# EAGLE board Coprocessor_Board_Rev2 (EAGLE 8.5.2)
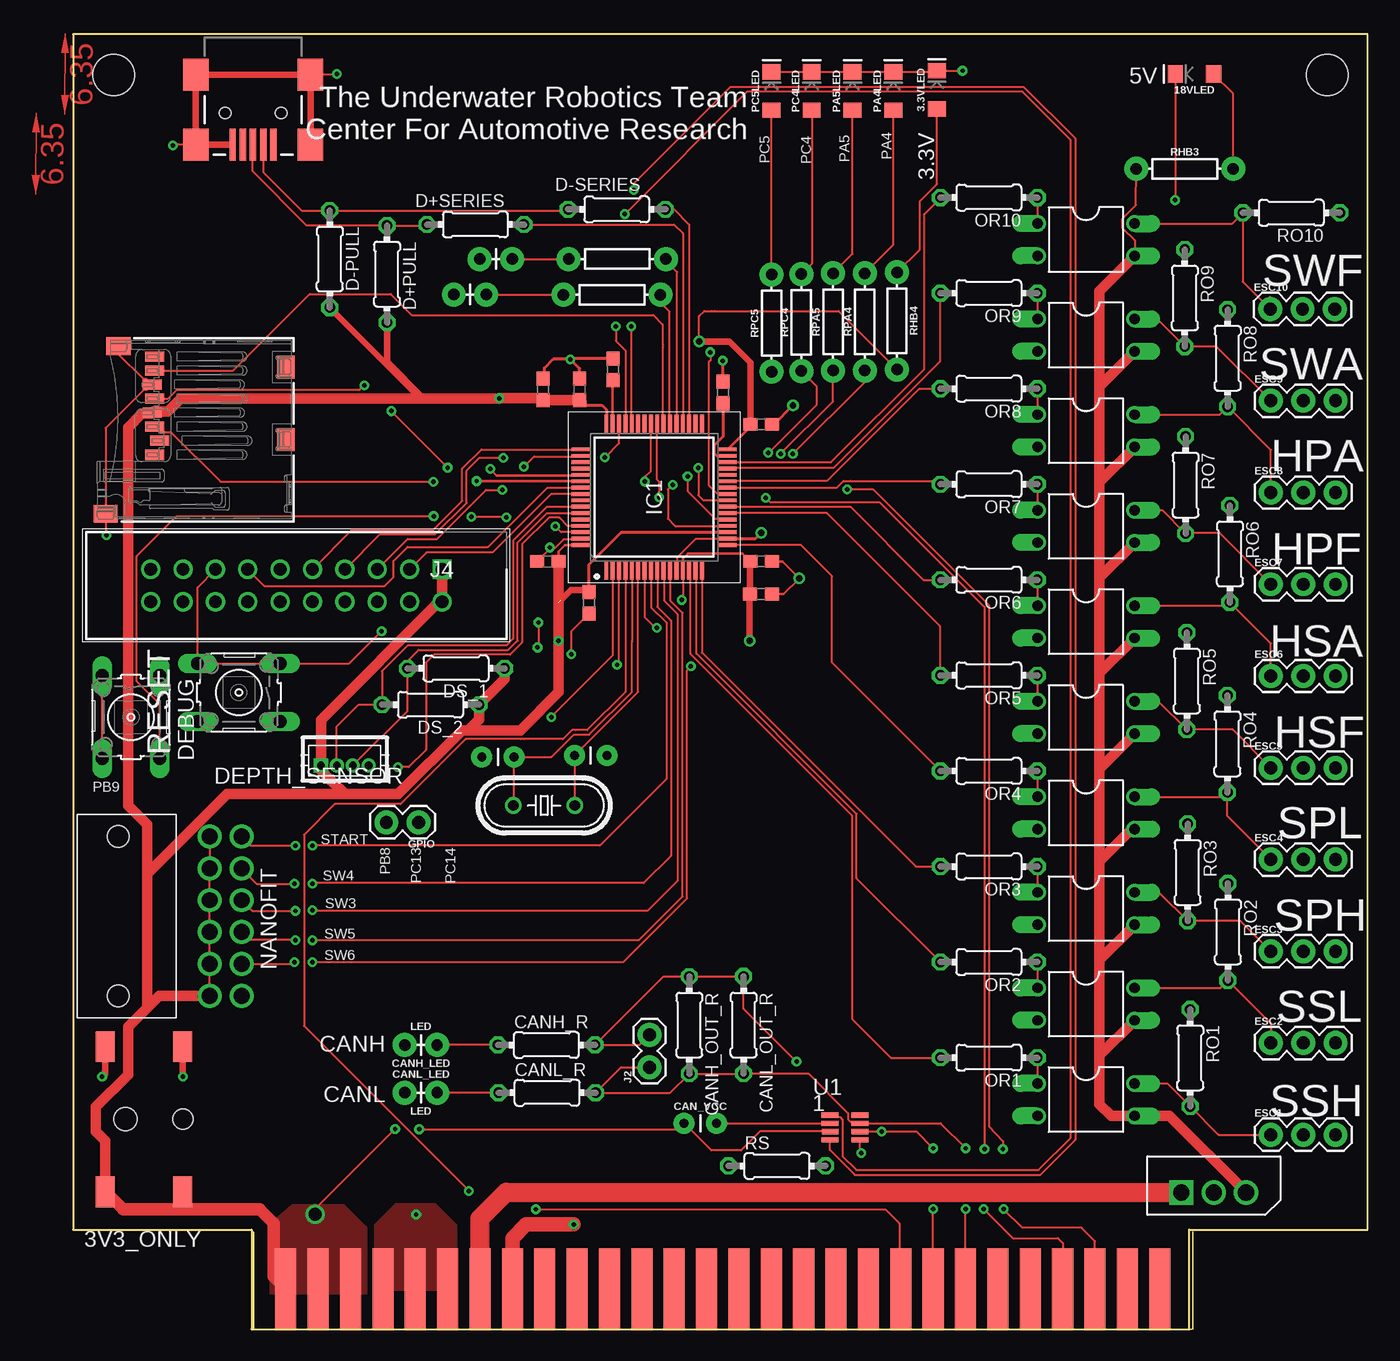
[diagram p0: board, top side]
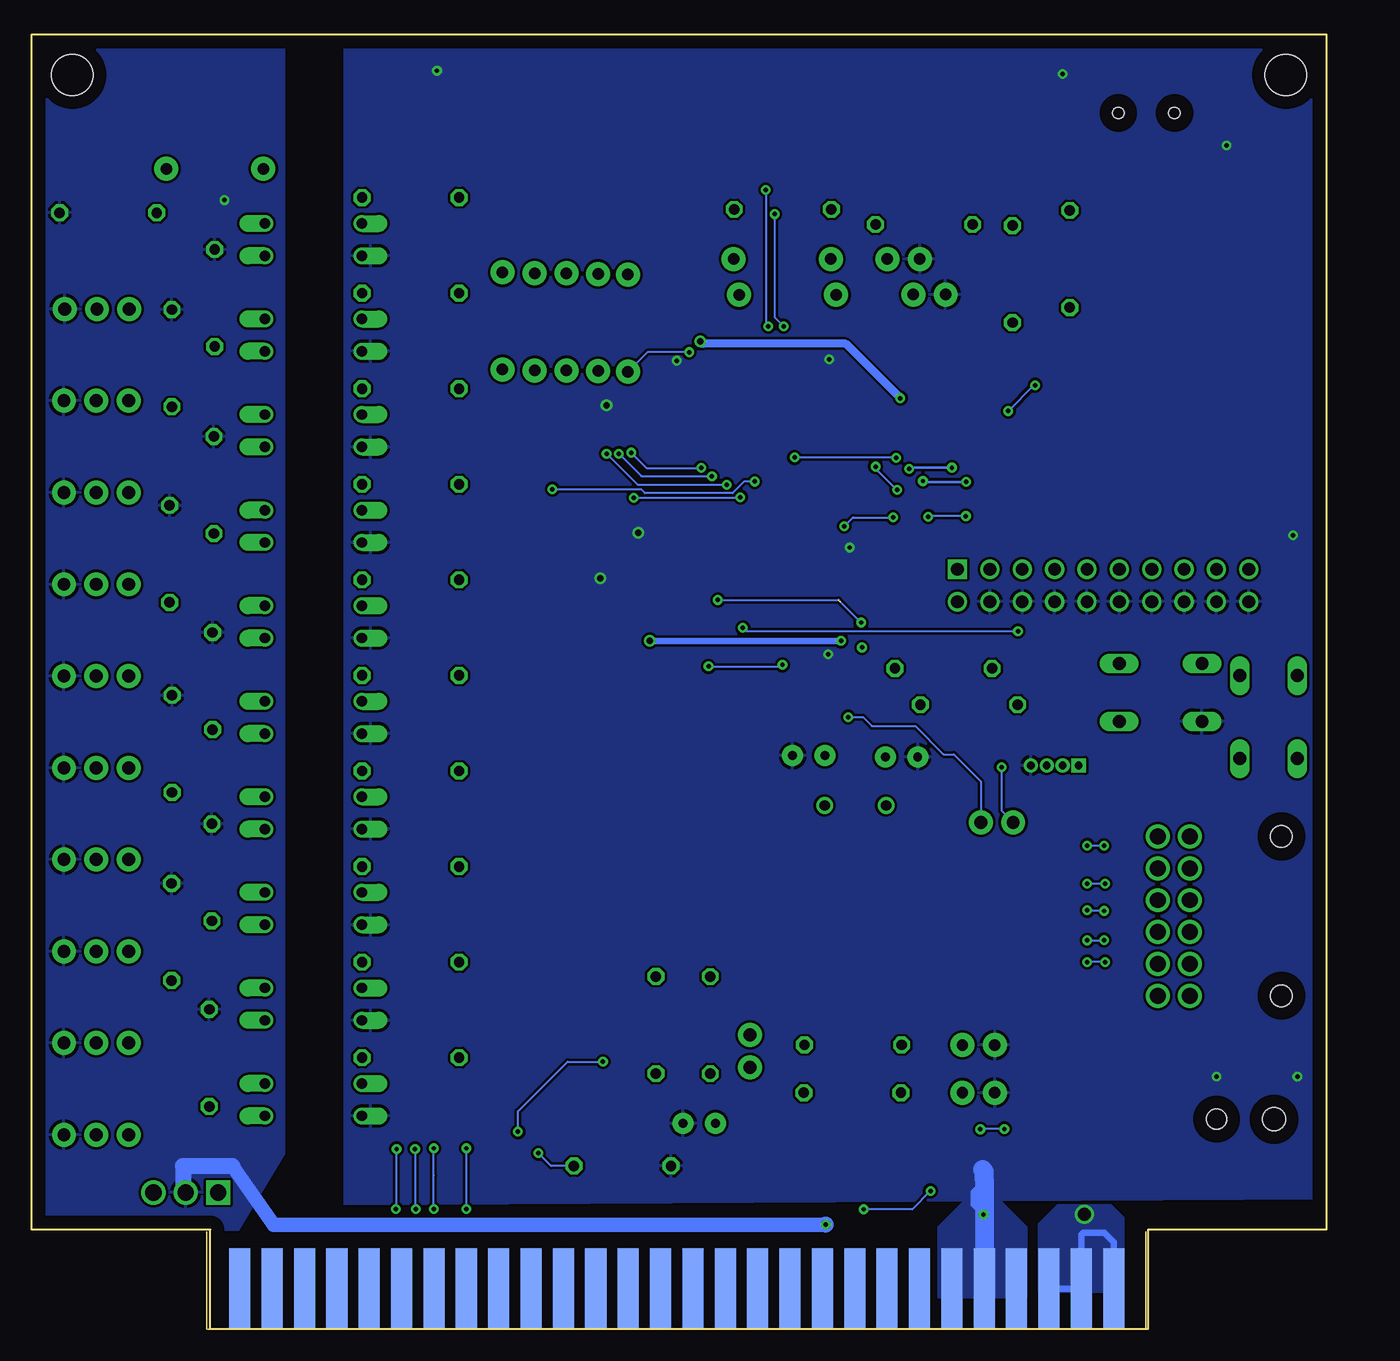
[diagram p1: board, bottom side, seen from below]

Size 101.6 x 101.6 mm. Coordinates in mm from the lower left corner, seen from the top.
Outline: 14,0 87.6,0 87.6,7.8 101.6,7.8 101.6,101.6 0,101.6 0,7.8 14,7.8 14,0
Copper layers (1*16): Top 0.035mm / dielectric 1.5mm / Bottom 0.035mm
Design rules "battery_balancer": minimum track width 6mil, minimum drill 0.35mm, track to track 0.205mm, track to pad 0.205mm, pad to pad 0.205mm, via to via 0.205mm, smd to smd 6mil, copper to edge 40mil, drill to drill 6mil, minimum pad ring 10mil, minimum via ring 8mil, stop-mask expansion 4mil, vias tented up to drill 0mil, thermal gap 10mil
Holes 3.26 mm at 3.17,98.42 98.42,98.42

## Footprints (pad centres in the part's own frame; a part is rotated, then mirrored left to right if it is on the bottom)
LED-1206 = smd 1.2 x 1.4: A -1.5,0; C 1.5,0
CUI_PJ-002AH-SMT-TR = smd 1.5 x 2.4: 1.1 -3.05,5.7; 1.2 3.05,5.7; 2 -3.05,-5.7; 3 3.05,-5.7 | hole 1.6: -3.05,0 | hole 1.8: 1.45,0
0603 = smd 1.1 x 1: 1 -0.85,0; 2 0.85,0
CAP-PTH-2.54 = drill 0.7 pad 1.651: 1 -1.27,0; 2 1.27,0
AXIAL-0.1 = drill 0.9 pad 1.88: P$1 -1.27,0; P$2 1.27,0
0204/7 = drill 0.813 octagon: 1 -3.81,0; 2 3.81,0
B3F-10XX = drill 1.016 long: 1 -3.251,2.261; 2 3.251,2.261; 3 -3.251,-2.261; 4 3.251,-2.261
DF13-4P-1.25DSA = drill 0.6 pad 1.016 square: P$1 1.875,0 | drill 0.6 pad 1.016: P$2 0.625,0; P$3 -0.625,0; P$4 -1.875,0
1X03 = drill 1.016 pad 1.88: 1 0,0; 2 2.54,0; 3 5.08,0
1X02 = drill 1.016 pad 1.88: 1 0,0; 2 2.54,0
QFP50P1200X1200X160-64N = smd 1.45 x 0.3: 1 -5.75,3.75; 2 -5.75,3.25; 3 -5.75,2.75; 4 -5.75,2.25; 5 -5.75,1.75; 6 -5.75,1.25; 7 -5.75,0.75; 8 -5.75,0.25; 9 -5.75,-0.25; 10 -5.75,-0.75; 11 -5.75,-1.25; 12 -5.75,-1.75; 13 -5.75,-2.25; 14 -5.75,-2.75; 15 -5.75,-3.25; 16 -5.75,-3.75; 33 5.75,-3.75; 34 5.75,-3.25; 35 5.75,-2.75; 36 5.75,-2.25; 37 5.75,-1.75; 38 5.75,-1.25; 39 5.75,-0.75; 40 5.75,-0.25; 41 5.75,0.25; 42 5.75,0.75; 43 5.75,1.25; 44 5.75,1.75; 45 5.75,2.25; 46 5.75,2.75; 47 5.75,3.25; 48 5.75,3.75 | smd 0.3 x 1.45: 17 -3.75,-5.75; 18 -3.25,-5.75; 19 -2.75,-5.75; 20 -2.25,-5.75; 21 -1.75,-5.75; 22 -1.25,-5.75; 23 -0.75,-5.75; 24 -0.25,-5.75; 25 0.25,-5.75; 26 0.75,-5.75; 27 1.25,-5.75; 28 1.75,-5.75; 29 2.25,-5.75; 30 2.75,-5.75; 31 3.25,-5.75; 32 3.75,-5.75; 49 3.75,5.75; 50 3.25,5.75; 51 2.75,5.75; 52 2.25,5.75; 53 1.75,5.75; 54 1.25,5.75; 55 0.75,5.75; 56 0.25,5.75; 57 -0.25,5.75; 58 -0.75,5.75; 59 -1.25,5.75; 60 -1.75,5.75; 61 -2.25,5.75; 62 -2.75,5.75; 63 -3.25,5.75; 64 -3.75,5.75
USB-MINIB = smd 2.5 x 0.5: D+ 2.5,0; D- 2.5,0.8; GND 2.5,-1.6; ID 2.5,-0.8; VBUS 2.5,1.6 | smd 2.5 x 2: S1 -3,4.5; S2 2.5,4.5; S3 -3,-4.5; S4 2.5,-4.5 | hole 0.9: 0,2.2; 0,-2.2
SHDR20W81P254_2X10_3300X840X93 = drill 1 pad 1.5 square: 1 0,0 | drill 1 pad 1.5: 2 0,2.54; 3 2.54,0; 4 2.54,2.54; 5 5.08,0; 6 5.08,2.54; 7 7.62,0; 8 7.62,2.54; 9 10.16,0; 10 10.16,2.54; 11 12.7,0; 12 12.7,2.54; 13 15.24,0; 14 15.24,2.54; 15 17.78,0; 16 17.78,2.54; 17 20.32,0; 18 20.32,2.54; 19 22.86,0; 20 22.86,2.54
5008730806 = smd 0.8 x 1.5: 1 -1.94,10.7; 2 -0.84,10.3; 3 0.26,10.7; 4 1.36,10.9; 5 2.46,10.7; 6 3.56,10.9; 7 4.66,10.7; 8 5.76,10.7 | smd 1.8 x 1.4: CD1 -0.75,0.4; CD2 4.95,0.4 | smd 1.4 x 1.9: S3 -6.575,14.55; S4 6.575,13.55
DIL04 = drill 0.813 offset: 1 -1.27,-3.81; 2 1.27,-3.81; 3 1.27,3.81; 4 -1.27,3.81
HC49/S = drill 0.813: 1 -2.413,0; 2 2.413,0
TO254P450X1020X1935-3P = drill 1.27 square: 1 -5.08,-1.092 | drill 1.27: 2 -2.54,-1.092; 3 0,-1.092
AXIAL-0.3 = drill 0.9 pad 1.88: P$1 -3.81,0; P$2 3.81,0
8-SOICN = smd 1.3 x 0.42: 1 -1.175,0.975; 2 -1.175,0.325; 3 -1.174,-0.325; 4 -1.175,-0.975; 5 1.175,0.975; 6 1.175,0.325; 7 1.174,-0.325; 8 1.175,-0.975
5530843-6-BOARDFINGERS = smd 1.651 x 6.35 bottom: 3.3V_4 0.826,3.175; 3.3V_5 3.365,3.175; 3.3V_6 5.905,3.175; EXTRA1 16.066,3.175; EXTRA2 18.605,3.175; EXTRA3 21.145,3.175; EXTRA4 23.686,3.175; EXTRA5 26.226,3.175; EXTRA6 28.765,3.175; EXTRA7 31.305,3.175; EXTRA8 33.846,3.175; EXTRA9 36.386,3.175; EXTRA10 38.925,3.175; EXTRA11 41.465,3.175; EXTRA12 44.005,3.175; EXTRA13 46.545,3.175; EXTRA14 49.086,3.175; EXTRA15 51.626,3.175; EXTRA16 54.166,3.175; EXTRA17 56.706,3.175; EXTRA18 59.245,3.175; EXTRA19 61.785,3.175; EXTRA20 64.326,3.175; EXTRA21 66.865,3.175; EXTRA22 69.406,3.175; GND_4 8.445,3.175; GND_5 10.986,3.175; GND_6 13.525,3.175 | smd 1.651 x 6.35: 3.3VP1 0.826,3.175; 3.3VP2 3.365,3.175; 3.3VP3 5.905,3.175; CAN_H 51.626,3.175; CAN_L 54.166,3.175; EXTRA23 16.066,3.175; EXTRA24 18.605,3.175; EXTRA25 21.145,3.175; EXTRA26 23.686,3.175; EXTRA27 26.226,3.175; EXTRA28 28.765,3.175; EXTRA29 31.305,3.175; EXTRA30 33.846,3.175; EXTRA31 36.386,3.175; EXTRA32 38.925,3.175; EXTRA33 41.465,3.175; EXTRA34 44.005,3.175; EXTRA35 46.545,3.175; GND1 8.445,3.175; GND2 10.986,3.175; GND3 13.525,3.175; KILL_SWITCH 49.086,3.175; SCL_DEPTH 59.245,3.175; SCL_ESC 69.406,3.175; SCL_SENSOR 64.326,3.175; SDA_DEPTH 56.706,3.175; SDA_ESC 66.865,3.175; SDA_SENSOR 61.785,3.175
105314-2112 = drill 1.25: CK1 12.5,2.5; CK2 10,2.5; CK3 7.5,2.5; CK4 5,2.5; CK5 2.5,2.5; CK6 0,2.5; CK7 12.5,0; CK8 10,0; CK9 7.5,0; CK10 5,0; CK11 2.5,0; CK12 0,0 | hole 1.7: 0,-7.18; 12.5,-7.18

## Placement (x,y rotation side)
3.3VLED  WHITE  [LED-1206]  67.8,97.25 90 top
3V3_ONLY  PJ-002AH-SMT-TR  [CUI_PJ-002AH-SMT-TR]  5.56,16.47 180 top
18VLED  WHITE  [LED-1206]  88,98.5 180 top
C1  4.7 uF  [0603]  36.88,73.74 90 top
C2  .1 uF  [0603]  39.75,73.75 90 top
C3  .1 uF  [0603]  37.25,60.25 180 top
C4  .1 uF  [0603]  40.5,57 270 top
C5  .1 uF  [0603]  54,71 0 top
C7  1 uF  [0603]  54,60.25 0 top
C8  1 nF  [CAP-PTH-2.54]  33.35,44.9 0 top
C9  1 nF  [CAP-PTH-2.54]  40.63,45.01 180 top
C10  .1 uF  [0603]  53.99,57.68 0 top
C11  2.2uF  [0603]  42.38,75.32 270 top
C12  2.2 uF  [0603]  51,73.5 90 top
CAN_VCC  .1 uF  [CAP-PTH-2.54]  49.23,16.15 0 top
CANH_LED  LED  [AXIAL-0.1]  27.3,22.3 180 top
CANH_OUT_R  120  [0204/7]  48.36,23.85 270 top
CANH_R  330  [0204/7]  37.15,22.3 0 top
CANL_LED  LED  [AXIAL-0.1]  27.3,18.55 0 top
CANL_OUT_R  120  [0204/7]  52.62,23.86 270 top
CANL_R  330  [0204/7]  37.2,18.55 0 top
D+PULL  1.5k  [0204/7]  24.64,82.8 270 top
D+SERIES  22Ω  [0204/7]  31.58,86.69 180 top
D-PULL  1.5k  [0204/7]  20.15,83.98 270 top
D-SERIES  22Ω  [0204/7]  42.67,87.88 180 top
DEBUG  [B3F-10XX]  4.54,48.02 270 top
DEPTH_SENSOR  DF13-4P-1.25DSA  [DF13-4P-1.25DSA]  21.32,44.23 180 top
DS_1  4.7k  [0204/7]  30.05,51.85 180 top
DS_2  4.7k  [0204/7]  28.05,49 180 top
ESC1  [1X03]  94,15.25 0 top
ESC2  [1X03]  94,22.45 0 top
ESC3  [1X03]  94,29.65 0 top
ESC4  [1X03]  94,36.85 0 top
ESC5  [1X03]  94,44.05 0 top
ESC6  [1X03]  94,51.25 0 top
ESC7  [1X03]  94,58.45 0 top
ESC8  [1X03]  94,65.65 0 top
ESC9  [1X03]  94,72.85 0 top
ESC10  [1X03]  93.95,80.05 0 top
GPIO  [1X02]  27.13,39.78 180 top
HBL1  LED  [AXIAL-0.1]  33.19,83.98 180 top
HBL2  LED  [AXIAL-0.1]  31.15,81.19 180 top
IC1  STM32F405RGT6  [QFP50P1200X1200X160-64N]  45.6,65.29 90 top
J1  USB_MINI-B_SMT  [USB-MINIB]  14.13,95.45 270 top
J2  [1X02]  45.24,20.55 90 top
J4  30320-6002HB  [SHDR20W81P254_2X10_3300X840X93]  28.95,59.62 180 top
J5  5008730806  [5008730806]  17.11,70.56 90 top
OI1  SFH610  [DIL04]  79.5,18 270 top
OI2  SFH610  [DIL04]  79.5,25.5 270 top
OI3  SFH610  [DIL04]  79.5,33 270 top
OI4  SFH610  [DIL04]  79.5,40.5 270 top
OI5  SFH610  [DIL04]  79.5,48 270 top
OI6  SFH610  [DIL04]  79.5,55.5 270 top
OI7  SFH610  [DIL04]  79.5,63 270 top
OI8  SFH610  [DIL04]  79.5,70.5 270 top
OI9  SFH610  [DIL04]  79.5,78 270 top
OI10  SFH610  [DIL04]  79.5,85.5 270 top
OR1  220  [0204/7]  71.88,21.3 180 top
OR2  220  [0204/7]  71.88,28.8 180 top
OR3  220  [0204/7]  71.88,36.3 180 top
OR4  220  [0204/7]  71.88,43.8 180 top
OR5  220  [0204/7]  71.88,51.3 180 top
OR6  220  [0204/7]  71.88,58.8 180 top
OR7  220  [0204/7]  71.88,66.3 180 top
OR8  220  [0204/7]  71.88,73.8 180 top
OR9  220  [0204/7]  71.88,81.3 180 top
OR10  220  [0204/7]  71.88,88.8 180 top
OSCILLATOR  [HC49/S]  36.97,41.09 180 top
PA4LED  WHITE  [LED-1206]  64.38,97.16 90 top
PA5LED  WHITE  [LED-1206]  61.18,97.16 90 top
PC4LED  WHITE  [LED-1206]  57.97,97.16 90 top
PC5LED  WHITE  [LED-1206]  54.82,97.16 90 top
Q1  L78M05CV  [TO254P450X1020X1935-3P]  92.06,11.8 0 top
RESET  [B3F-10XX]  13.01,49.96 180 top
RHB1  1k  [AXIAL-0.3]  42.71,83.98 180 top
RHB2  1k  [AXIAL-0.3]  42.29,81.17 180 top
RHB3  1.8k  [AXIAL-0.3]  87.24,91.06 0 top
RHB4  330  [AXIAL-0.3]  64.66,79.12 270 top
RO1  10k  [0204/7]  87.67,21.28 270 top
RO2  10k  [0204/7]  90.64,31.16 270 top
RO3  10k  [0204/7]  87.47,35.84 270 top
RO4  10k  [0204/7]  90.59,45.93 270 top
RO5  10k  [0204/7]  87.42,50.85 270 top
RO6  10k  [0204/7]  90.79,60.83 270 top
RO7  10k  [0204/7]  87.31,66.24 270 top
RO8  10k  [0204/7]  90.61,76.2 270 top
RO9  10k  [0204/7]  87.25,80.92 270 top
RO10  10k  [0204/7]  95.61,87.61 180 top
RPA4  330  [AXIAL-0.3]  62.13,79.05 90 top
RPA5  330  [AXIAL-0.3]  59.64,79.05 90 top
RPC4  330  [AXIAL-0.3]  57.15,79 90 top
RPC5  330  [AXIAL-0.3]  54.82,78.95 90 top
RS  0  [0204/7]  55.25,12.8 0 top
U1  MAX3051ESA  [8-SOICN]  60.58,15.82 0 top
U$1  5530843  [5530843-6-BOARDFINGERS]  15.88,0 0 top
U$2  105314-2112  [105314-2112]  10.72,38.66 270 top

## Library data of the parts
3.3VLED 18VLED PA4LED PA5LED PC4LED PC5LED = SparkFun-LED; PROD_ID: DIO-09955
3V3_ONLY = PJ-002AH-SMT-TR; AVAILABILITY: Good; DESCRIPTION: 24 VDC 5 A Surface Mount Unshielded 2 Conductors 3 Contacts Male Power Jack; MF: CUI; MP: PJ-002AH-SMT-TR; PACKAGE: None; PRICE: 0.98 USD
C1-C5 C7 C10-C12 = SparkFun-Capacitors; PROD_ID: CAP-08390
C8 C9 CAN_VCC = SparkFun-Capacitors; PROD_ID: CAP-09128
CANH_LED CANL_LED HBL1 HBL2 RHB1 RHB3 RHB4 RPA4 RPA5 RPC4 RPC5 = SparkFun-Resistors; PROD_ID: RES-12182
CANH_OUT_R CANH_R CANL_OUT_R CANL_R D+PULL D+SERIES D-PULL D-SERIES DS_1 DS_2 OR1-OR10 RO1-RO10 RS = resistor
DEBUG RESET = switch-omron; MPN: B3F-1000; OC_FARNELL: 176432; OC_NEWARK: 36M3542
DEPTH_SENSOR = con-hirose-df13
ESC1-ESC10 = SparkFun-Connectors; PROD_ID: XXX-00000
GPIO J2 = SparkFun-Connectors
IC1 = STM32F405RGT6; ALLIED_NUMBER: 70391099; DESCRIPTION: MCU 32-Bit, ARM Cortex M4, 1MB Flash STMicroelectronics STM32F405RGT6, 32bit ARM Cortex M4F Microcontroller, 168MHz, 1024 kB Flash, 64-Pin LQFP; HEIGHT: 1.6mm; MANUFACTURER_NAME: STMicroelectronics; MANUFACTURER_PART_NUMBER: STM32F405RGT6; RS_PART_NUMBER: 7468217; SUPPLIER_NAME: RS
J1 = SparkFun-Connectors; PROD_ID: CONN-08193; SF_ID: PRT-00587
J4 = 30320-6002HB; DESCRIPTION: Header 20 position 3M 303 Series, 2.54mm Pitch 20 Way 2 Row Shrouded Straight PCB Header, Through Hole, Solder Termination; HEIGHT: 9.3mm; MANUFACTURER_NAME: 3M; MANUFACTURER_PART_NUMBER: 30320-6002HB; RS_PART_NUMBER: 8273587; SUPPLIER_NAME: RS
J5 = 5008730806; AVAILABILITY: Good; DESCRIPTION: Connector: for cards; SD Micro; push-push; SMT; gold plated; PIN: 8; MF: Molex; MP: 500873-0806; PACKAGE: None; PRICE: 2.47 USD
OI1-OI10 = optocoupler; MF: VISHAY/TELEFUNKEN; MPN: SFH6106-4; OC_FARNELL: 1469568; OC_NEWARK: 58K2193
OSCILLATOR = crystal; OC_FARNELL: 1667008; OC_NEWARK: unknown
Q1 = L78M05CV; AVAILABILITY: Good; DESCRIPTION: L78M05 Series 5 V 500 mA Three Terminal Positive Voltage Regulator - TO-220; MF: STMicroelectronics; MP: L78M05CV; PACKAGE: TO-220 STMicroelectronics; PRICE: 0.29 USD
RHB2 = SparkFun-Resistors; PROD_ID: RES-08380
U1 = MAX3051ESA; AVAILABILITY: Good; DESCRIPTION: IC TXRX CAN 1MBPS 8-SOIC; MF: Maxim Integrated; MP: MAX3051ESA+; PACKAGE: SOIC-8 Maxim Integrated; PRICE: 2.18 USD
U$1 = 5530843-6
U$2 = 105314-2112 nanofit hdr; SPICEPREFIX: X

## Nets
3.3V: 3V3_ONLY.1.1 3V3_ONLY.1.2 C1.1 C2.1 C3.1 C4.1 C5.1 C7.1 C10.1 CAN_VCC.1 D+PULL.2 D-PULL.2 DEPTH_SENSOR.P$1 DS_1.1 DS_2.1 IC1.13 IC1.19 IC1.32 IC1.48 IC1.64 J4.1 J4.2 J5.4 RHB4.P$2 U1.3 U$1.3.3V_4 U$1.3.3V_5 U$1.3.3V_6 U$1.3.3VP1 U$1.3.3VP2 U$1.3.3VP3 U$2.CK7 U$2.CK8 U$2.CK9 U$2.CK10 U$2.CK11 U$2.CK12
5V: OI1.3 OI2.3 OI3.3 OI4.3 OI5.3 OI6.3 OI7.3 OI8.3 OI9.3 OI10.3 Q1.3 RHB3.P$1
18V: Q1.1 U$1.EXTRA23
CAN1_RXD: IC1.44 U1.4
CAN1_TXD: IC1.45 U1.1
CANH: CANH_OUT_R.1 CANH_R.2 CANL_OUT_R.1 J2.2 U1.7 U$1.CAN_H
CANL: CANH_OUT_R.2 CANL_OUT_R.2 CANL_R.2 J2.1 U1.6 U$1.CAN_L
D+CON: D+PULL.1 D+SERIES.2 J1.D+
D-CON: D-PULL.1 D-SERIES.2 J1.D-
DEPTHSCL: DEPTH_SENSOR.P$2 DS_2.2 IC1.58
DEPTHSDA: DEPTH_SENSOR.P$3 DS_1.2 IC1.59
GND: 3.3VLED.C 3V3_ONLY.2 3V3_ONLY.3 C1.2 C2.2 C3.2 C4.2 C5.2 C7.2 C8.1 C9.1 C10.2 C11.1 C12.2 CAN_VCC.2 CANH_LED.P$2 CANL_LED.P$1 DEPTH_SENSOR.P$4 HBL1.P$2 HBL2.P$2 IC1.12 IC1.18 IC1.63 J1.GND J1.S1 J1.S2 J1.S3 J1.S4 J4.4 J4.6 J4.8 J4.10 J4.12 J4.14 J4.16 J4.18 J4.20 J5.6 J5.S3 J5.S4 OI1.2 OI2.2 OI3.2 OI4.2 OI5.2 OI6.2 OI7.2 OI8.2 OI9.2 OI10.2 PA4LED.C PA5LED.C PC4LED.C PC5LED.C RESET.2 RS.1 U1.2 U$1.GND1 U$1.GND2 U$1.GND3 U$1.GND_4 U$1.GND_5 U$1.GND_6
GNDBAT: 18VLED.C ESC1.3 ESC2.3 ESC3.3 ESC4.3 ESC5.3 ESC6.3 ESC7.3 ESC8.3 ESC9.3 ESC10.3 Q1.2 RO1.1 RO2.1 RO3.1 RO4.1 RO5.1 RO6.1 RO7.1 RO8.1 RO9.1 RO10.1 U$1.EXTRA24
HEARTBEAT_1: IC1.37 RHB1.P$1
HEARTBEAT_2: IC1.38 RHB2.P$1
HEARTBEAT_3: IC1.20 RPA4.P$1
HEARTBEAT_4: IC1.21 RPA5.P$1
HEAVE_PORT_AFT: IC1.27 OR8.2
HEAVE_PORT_FWD: IC1.26 OR7.2
HEAVE_STBD_AFT: IC1.23 OR6.2
HEAVE_STBD_FWD: IC1.22 OR5.2
JTAG15: IC1.7 J4.15 RESET.3 RESET.4
KILLSWITCH: IC1.4 U$1.KILL_SWITCH
MISSION_START: IC1.8 U$2.CK6
N$1: HBL1.P$1 RHB1.P$2
N$2: RS.2 U1.8
N$3: 18VLED.A RHB3.P$2
N$4: 3.3VLED.A RHB4.P$1
N$5: CANH_LED.P$1 CANH_R.1
N$6: CANL_LED.P$2 CANL_R.1
N$7: PA4LED.A RPA4.P$2
N$8: PA5LED.A RPA5.P$2
N$9: DEBUG.3 DEBUG.4
N$10: PC4LED.A RPC4.P$2
N$11: PC5LED.A RPC5.P$2
N$14: HBL2.P$1 RHB2.P$2
PB8: GPIO.2 IC1.61
PB9: DEBUG.2 IC1.62
PC4: IC1.24 RPC4.P$1
PC5: IC1.25 RPC5.P$1
PC13: GPIO.1 IC1.2
PWM1: OI1.1 OR1.1
PWM2: OI2.1 OR2.1
PWM3: OI3.1 OR3.1
PWM4: OI4.1 OR4.1
PWM5: OI5.1 OR5.1
PWM5V1: ESC1.1 OI1.4 RO1.2
PWM5V2: ESC2.1 OI2.4 RO2.2
PWM5V3: ESC3.1 OI3.4 RO3.2
PWM5V4: ESC4.1 OI4.4 RO4.2
PWM5V5: ESC5.1 OI5.4 RO5.2
PWM5V6: ESC6.1 OI6.4 RO6.2
PWM5V7: ESC7.1 OI7.4 RO7.2
PWM5V8: ESC8.1 OI8.4 RO8.2
PWM5V9: ESC9.1 OI9.4 RO9.2
PWM5V10: ESC10.1 OI10.4 RO10.2
PWM6: OI6.1 OR6.1
PWM7: OI7.1 OR7.1
PWM8: OI8.1 OR8.1
PWM9: OI9.1 OR9.1
PWM10: OI10.1 OR10.1
RCC_OSC_IN: C8.2 IC1.5 OSCILLATOR.2
RCC_OSC_OUT: C9.2 IC1.6 OSCILLATOR.1
SCL_BKPLN: IC1.41 U$1.SCL_SENSOR
SDA_BKPLN: IC1.40 U$1.SDA_SENSOR
SDIO_CK: IC1.53 J5.5
SDIO_CMD: IC1.54 J5.3
SDIO_DO: IC1.39 J5.7
SURGEPORTHI: IC1.16 OR3.2
SURGEPORTLOW: IC1.17 OR4.2
SURGESTBDHI: IC1.14 OR1.2
SURGESTBDLOW: IC1.15 OR2.2
SW_AFT: IC1.29 OR9.2
SW_FWD: IC1.30 OR10.2
SWITCH6: IC1.3 U$2.CK2
SWITCH_3: IC1.9 U$2.CK5
SWITCH_4: IC1.10 U$2.CK4
SWITCH_5: IC1.11 U$2.CK3
SYS_JTCK-SWCLK: IC1.49 J4.9
SYS_JTDI: IC1.46 J4.7
SYS_JTDO-SWO: IC1.55 J4.13
SYS_JTMS-SWIDIO: IC1.50 J4.5
SYS_JTRST: IC1.56 J4.3
USB_OTG_HS_DM: D-SERIES.1 IC1.35
USB_OTG_HS_DP: D+SERIES.1 IC1.36
VBUS: J1.VBUS
VCAP: C11.2 IC1.47
VCAP2: C12.1 IC1.31

## Tracks (layer width: path | path; a pad name or v marks a point on that pad's centre or on a via)
3.3V  (via drill 0.35, 0.5, 1)  (1 unrouted)
  Top 0.152: v19,9 19,9.42 v25.27,15.7 | U1.3 53.9,15.5 52.43,14.02 50.09,14.02 47.98,16.13 | 47.98,16.13 CAN_VCC.1 | v27.16,15.68 47.53,15.68 47.98,16.13 | U$2.CK7 U$2.CK8 U$2.CK9 U$2.CK10 U$2.CK11 U$2.CK12 | IC1.13 47.85,57.31 v47.76,57.22 | v36.52,55.45 36.52,53.57 v36.45,53.49 | v49.13,77.5 49.13,79.48 49.55,79.9 50.14,79.9 50.35,79.9 60.07,79.9 RHB4.P$2
  Top 0.203: IC1.64 38.59,61.54 38.1,61.04 C3.1 | IC1.13 47.85,60.46 48.26,60.87 52.53,60.87 C7.1
  Top 0.25: C2.1 39.9,72.75 40.15,72.5 41.5,72.5 41.85,72.15 IC1.48 | 38.1,55.5 38.15,55.5 | 22.89,73.03 22.96,72.96 | C5.1 53.15,70.84 IC1.32 | C7.1 53.08,60.25 | C4.1 40.5,58 40.5,60 43.04,62.54 IC1.19
  Top 0.5: v49.13,77.5 51.5,77.5 53.15,75.85 C5.1
  Top 0.508: 38.1,57 39.1,58 40.5,58 | 53.08,60.25 53.14,60.19 C10.1 52.93,57.48 53.1,57.31 v53.1,54.01 | D+PULL.2 24.64,75.91 27.51,73.03 27.29,73.03 D-PULL.2
  Top 0.762: 2.54,10.8 3V3_ONLY.1.2
  Top 0.813: C3.1 38.1,57 38.1,55.5 38.1,53.1 38.1,50 35.1,47 31,47 | 21.33,41.99 20.26,43.06 20.22,43.06 19.45,43.83 DEPTH_SENSOR.P$1 19.45,47.81 28.72,57.09 J4.2 J4.1 | C1.1 39.76,72.89 39.9,72.75 | 36.73,73.03 C1.1 | C1.1 36.71,73.06 v33.44,73.06 33.41,73.03 27.51,73.03 22.89,73.03 8.44,73.03 7.41,72.01 6.3,72.01 J5.4 6.12,71.83 5.4,71.83 4.32,70.74 4.32,41.09 5.81,39.6 5.81,35.7 | 2.54,10.8 2.54,14.76 1.79,15.51 1.79,17.43 4.32,19.96 4.32,23.72 5.81,25.22 | 31,47 30.53,47 25.53,41.99 21.33,41.99 | 31,47 31.86,47.86 DS_2.1 33.86,51 DS_1.1 | 5.81,25.22 5.81,35.7 | 5.81,25.22 6.75,26.16 U$2.CK7 | 5.81,35.7 12.1,41.99 21.33,41.99
  Top 1: U$1.3.3V_4 15.74,4.14 15.74,8.31 14.66,9.39 8.63,9.39 | 2.54,10.8 3.95,9.39 8.63,9.39 | 8.63,9.39 8.61,9.41 3V3_ONLY.1.1
  Bottom 0.152: v25.27,15.7 27.14,15.7 v27.16,15.68 | v47.76,57.22 38.3,57.22 v36.52,55.45
  Bottom 0.5: 52.5,54 v53.1,54.01
  Bottom 0.508: 52.5,54 39.5,54 v38.1,54.01 | U$1.3.3V_4 16.7,6.79 17.44,7.54 19.13,7.54 19.24,7.43 U$1.3.3V_5 U$1.3.3V_6
  Bottom 0.61: v33.44,73.06 37.71,77.33 48.96,77.33 v49.13,77.5
  pour Top (no thermals): 15.5,2.75 15.5,8.25 17.25,9.75 21.25,9.75 23,8 23,2.75
  pour Bottom (no thermals): 15.92,2.88 22.6,2.88 22.6,8.21 21.08,9.74 16.93,9.74 15.92,8.72
5V
  Top 0.152: OI10.3 83.31,85.44 82.37,86.38 82.37,87.16 83.42,88.21 RHB3.P$1
  Top 0.813: Q1.3 86.04,16.73 OI1.3 81.47,16.73 80.55,17.65 80.55,21.47 | 80.55,21.47 80.55,28.97 | 80.55,28.97 80.55,36.7 | 80.55,36.7 80.55,43.97 | 80.55,43.97 80.55,51.47 | 80.55,51.47 80.55,58.97 | 80.55,58.97 80.55,66.47 | 80.55,66.47 80.55,73 80.55,73.97 | 80.55,73.97 80.55,81.47 OI10.3 | 80.55,21.47 OI2.3 | 80.55,28.97 OI3.3 | 80.55,36.7 83.08,39.23 OI4.3 | OI5.3 80.55,43.97 | OI6.3 80.55,51.47 | OI7.3 80.55,58.97 | OI8.3 80.55,66.47 | OI9.3 80.55,73.97
18V
  Top 1.5: U$1.EXTRA23 31.94,8.69 34,10.75 86.94,10.75 Q1.1
CAN1_RXD  (via drill 0.35)
  Top 0.152: v44,89.4 44,89.9 51.6,97.5 74.6,97.5 78.66,93.44 78.66,14.85 75.91,12.1 61.35,12.1 59.4,14.05 U1.4 | v43.8,78.7 43.8,71.09 IC1.44
  Bottom 0.152: v44,89.4 44,78.9 v43.8,78.7
CAN1_TXD  (via drill 0.35)
  Top 0.152: U1.1 59.56,16.64 60.17,16.64 60.4,16.41 60.4,13.55 61.48,12.48 | 61.48,12.48 61.5,12.46 | v43.3,87.5 52.94,97.14 74.45,97.14 78.3,93.29 78.3,15 75.78,12.48 61.48,12.48 | v42.6,78.7 42.6,77.55 43.35,76.8 IC1.45
  Bottom 0.152: v43.3,87.5 43.3,79.4 v42.6,78.7
CANH  (via drill 0.35)
  Top 0.152: U1.7 v63.44,15.5 | v63.44,15.5 v63.45,15.49 | v56.78,20.99 52.62,25.14 CANL_OUT_R.1 CANH_OUT_R.1 46.32,27.66 CANH_R.2 44.45,22.3 J2.2 | U$1.CAN_H 67.5,9.4 v67.49,9.42 | v67.49,14.18 66.17,15.5 v63.44,15.5
  Bottom 0.152: v63.45,15.49 63.45,17.09 59.55,20.99 v56.78,20.99 | v67.49,9.42 67.49,12.03 v67.49,14.18
CANL  (via drill 0.35)
  Top 0.152: U$1.CAN_L 70.04,9.4 v70.05,9.42 | J2.1 43.01,20.55 CANL_R.2 46.87,18.55 CANH_OUT_R.2 CANL_OUT_R.2 57.71,20.05 60.82,16.94 60.82,16.47 61.15,16.15 U1.6 68.09,16.15 v70.05,14.18
  Bottom 0.152: v70.05,9.42 70.05,12.03 v70.05,14.18
D+CON
  Top 0.152: 24.49,86.75 D+PULL.1 | D+PULL.1 24.74,86.61 | 24.74,86.61 27.68,86.61 D+SERIES.2 | 24.73,86.61 24.74,86.61 | D+PULL.1 18.35,86.61 14.1,90.86 14.1,92.92 J1.D+
D-CON
  Top 0.152: 19.91,87.55 D-PULL.1 | D-PULL.1 20.24,87.79 | 20.24,87.79 38.77,87.79 D-SERIES.2 | 20.23,87.78 20.24,87.79 | J1.D- 14.93,90.79 17.92,87.79 D-PULL.1
DEPTHSCL
  Top 0.152: IC1.58 37.19,64.54 34.54,61.88 34.54,54.18 34.01,53.65 26.26,53.65 24.24,51.63 DS_2.2 22.4,49 20.7,47.3 DEPTH_SENSOR.P$2
DEPTHSDA
  Top 0.152: DEPTH_SENSOR.P$3 26.24,48.52 DS_1.2 26.24,52.43 27.1,53.29 34.16,53.29 34.9,54.03 34.9,61.74 37.2,64.04 IC1.59
GND  (via drill 0.35, 0.5)
  Top 0.152: CAN_VCC.2 60.02,16.15 U1.2 | J1.S4 7.91,92.95 v7.85,92.89 | J5.S4 3.56,76.52 5.54,74.54 5.79,74.54 J5.6 5.79,73.7 5.54,73.7 2.56,70.72 J5.S3 2.56,62.37 v2.62,62.31 | IC1.12 47.42,59.61 47.42,60.57 48.88,62.04 IC1.18 | C4.2 39.09,54.74 v39.09,52.95 | C3.2 37.42,61.27 37.42,61.3 | 37.42,61.3 v37.42,61.33 | IC1.63 39.78,61.97 38.48,61.97 37.82,61.3 37.42,61.3 | J1.S1 18.68,98.5 v20.7,98.5 | PC5LED.C PC4LED.C PA5LED.C PA4LED.C 67.71,98.66 3.3VLED.C v69.79,98.75 v69.8,98.75
  Top 0.203: C7.2 55.66,60.25 v57,58.91 55.77,57.68 C10.2
  Top 0.25: C12.2 v51,76 | IC1.18 53.54,62.04 v54,62.5 | C5.2 55,71 v56.5,72.5
  Top 0.254: C1.2 37,74.7 37,75.43 37.67,76.11 v39.03,76.11 39.11,76.02 | C2.2 39.75,75.39 39.11,76.02 | C11.1 39.26,76.17 39.11,76.02
  Top 0.5: 3V3_ONLY.3 2.51,20.04 v2.29,19.81 | 3V3_ONLY.2 8.61,19.83 v8.63,19.81
  Top 0.508: J1.S2 J1.S1 J1.S3 J1.S4 J1.GND
  Bottom 0.203: 24.26,3.45 23.91,5.08 | 24.26,3.45 U$1.GND1 | 24,3.71 24.26,3.45
  Bottom 0.508: v26.92,8.97 27.68,9.74 27.68,10.75 26.86,11.57 26.86,11.77
  Bottom 1.5: U$1.GND2 26.86,11.77 26.86,12.36 27,12.5
  pour Bottom: 0,10.25 77.05,9.8 77.05,101.55 0,101.5
  pour Bottom (no thermals): 23.5,2.5 23.5,8 25.5,10 28.5,10 30.5,8 30.5,2.5
  pour Top (no thermals): 23.62,3.13 30.05,3.13 30.05,8.13 28.45,9.74 25.31,9.74 23.7,8.13 23.7,3.22
GNDBAT  (via drill 0.35)
  Top 0.152: 18VLED.C v86.5,88.6
  Top 1.143: U$1.EXTRA24 34.48,7.14 35.56,8.21 v39.28,8.21
  Bottom 1.143: 85.84,12.78 82.64,8.2 39.3,8.2
  Bottom 1.27: 39.3,8.2 v39.28,8.21 | 85.84,12.78 89.74,12.78 89.74,10.93 Q1.2
  pour Bottom: 101.67,7.79 101.67,101.51 101.59,101.59 81.78,101.39 81.78,13.78 85.42,7.79
HEARTBEAT_1
  Top 0.152: IC1.37 47.41,71.1 47.41,82.97 46.52,83.85 RHB1.P$1
HEARTBEAT_2
  Top 0.152: IC1.38 46.82,71.07 46.82,79.83 46.1,80.55 RHB2.P$1
  Top 0.25: 46.87,71.06 IC1.38
HEARTBEAT_3  (via drill 0.35)
  Top 0.152: v47.07,66.27 46.69,65.89 46.69,63.6 47.25,63.04 IC1.20 | RPA4.P$1 62.13,74.33 v56.49,68.7
  Bottom 0.152: v56.49,68.7 54.06,66.27 v47.07,66.27
HEARTBEAT_4  (via drill 0.35)
  Top 0.152: IC1.21 51.28,63.61 50.39,63.61 48.22,65.77 v48.22,66.93 | RPA5.P$1 59.64,72.81 v55.53,68.7
  Bottom 0.152: v55.53,68.7 53.76,66.93 v48.22,66.93
HEAVE_PORT_AFT
  Top 0.152: IC1.27 51.42,66.61 59.22,66.61 66.41,73.8 OR8.2
HEAVE_PORT_FWD
  Top 0.152: IC1.26 59.94,66.04 60.47,66.57 61.02,66.57 61.04,66.55 67.82,66.55 OR7.2
HEAVE_STBD_AFT
  Top 0.152: IC1.23 61,64.54 66.74,58.8 OR6.2
HEAVE_STBD_FWD
  Top 0.152: IC1.22 59.16,64.04 68.06,55.13 OR5.2
JTAG15  (via drill 0.35)
  Top 0.152: IC1.7 44.85,55.89 45.72,55.03 v45.8,55.03 | v24.21,54.77 21.66,52.22 RESET.3 RESET.4 9.76,58.21 J4.15
  Bottom 0.152: v45.8,55.03 45.55,54.77 v24.21,54.77
KILLSWITCH  (via drill 0.35)
  Top 0.152: v31.07,10.84 18.12,23.79 18.12,38.78 20.53,41.19 25.7,41.19 30.82,46.31 35.15,46.31 35.39,46.31 38.45,46.31 39.15,47.01 39.45,47.01 | U$1.KILL_SWITCH 64.85,3.29 64.85,8.3 63.75,9.4 v36.32,9.4 | 39.45,47.01 40.35,47.01 43.35,50.01 IC1.4 | 39.45,47.01
  Bottom 0.152: v31.07,10.84 32.51,9.4 v36.32,9.4
MISSION_START  (via drill 0.35)
  Top 0.152: IC1.8 45.38,59.51 45.38,56.64 46.56,55.45 46.56,43.16 41.35,37.95 v18.78,37.95 | v17.46,37.92 13.96,37.92 U$2.CK6
  Bottom 0.152: v18.78,37.95 17.48,37.95 v17.46,37.92
N$1
  Top 0.152: HBL1.P$1 RHB1.P$2
N$2  (via drill 0.35)
  Top 0.152: v61.85,13.8 61.75,13.9 U1.8
  Bottom 0.152: RS.2 60.85,12.8 v61.85,13.8
N$3
  Top 0.152: 18VLED.A 91.05,96.95 RHB3.P$2
N$4
  Top 0.152: RHB4.P$1 66.44,84.72 66.44,88.51 67.8,89.86 3.3VLED.A
N$5
  Top 0.152: CANH_R.1 CANH_LED.P$1
N$6
  Top 0.152: CANL_R.1 CANL_LED.P$2
N$7
  Top 0.152: RPA4.P$2 64.38,85.1 PA4LED.A
N$8
  Top 0.152: RPA5.P$2 61.18,84.39 PA5LED.A
N$9
  Top 0.152: DEBUG.4 DEBUG.3
N$10
  Top 0.152: PC4LED.A 57.97,83.62 RPC4.P$2
N$11
  Top 0.152: RPC5.P$2 PC5LED.A
N$14
  Top 0.152: HBL2.P$1 32.45,81.17 RHB2.P$2
PB8  (via drill 0.35)
  Top 0.152: IC1.61 38.81,63.04 38.17,63.68 37.35,63.68 35.26,61.59 35.26,53.88 34.3,52.94 28.34,52.94 27.7,52.3 27.7,45.45 26.35,44.1 v25.5,44.1
  Bottom 0.152: v25.5,44.1 25.5,40.69 GPIO.2
PB9  (via drill 0.35)
  Top 0.152: DEBUG.2 6.81,49.04 5,50.84 5,60.66 8.15,63.8 v28.3,63.8 | v31.24,63.76 33.94,63.76 v34,63.7 | IC1.62 38.31,62.54 v37.85,63
  Bottom 0.152: v28.3,63.8 31.2,63.8 v31.24,63.76 | v37.85,63 37.15,63.7 v34,63.7
PC4  (via drill 0.35)
  Top 0.152: v54.57,68.78 54.61,68.78 58.37,72.54 58.37,73.97 RPC4.P$1 | v49.08,67.59 49.08,65.43 49.45,65.05 51.34,65.05 IC1.24
  Bottom 0.152: v54.57,68.78 53.37,67.59 v49.08,67.59
PC5  (via drill 0.35)
  Top 0.152: v50.01,76.67 50.01,76 49.89,75.87 49.89,66.23 50.51,65.61 51.28,65.61 IC1.25
  Bottom 0.152: v50.01,76.67 50.04,76.69 53.26,76.69 RPC5.P$1
PC13  (via drill 0.35)
  Top 0.152: IC1.2 42.35,52.87 37.53,48.05 v37.53,48.02
  Bottom 0.152: v37.53,48.02 36.37,48.02 35.67,47.33 32.27,47.33 30.05,45.1 29.25,45.1 27.12,42.97 27.12,39.78 GPIO.1
PWM1
  Top 0.152: OR1.1 OI1.1
PWM2
  Top 0.152: OR2.1 OI2.1
PWM3
  Top 0.152: OR3.1 OI3.1
PWM4
  Top 0.152: OR4.1 OI4.1
PWM5
  Top 0.152: OR5.1 OI5.1
PWM5V1
  Top 0.152: OI1.4 85.88,19.27 RO1.2 89.89,15.25 ESC1.1
PWM5V2
  Top 0.152: OI2.4 90.05,26.77 RO2.2 94,23.99 ESC2.1
PWM5V3
  Top 0.152: OI3.4 85.23,34.27 RO3.2 91.62,32.03 ESC3.1
PWM5V4
  Top 0.152: OI4.4 90.25,41.77 RO4.2 90.59,40.26 ESC4.1
PWM5V5
  Top 0.152: OI5.4 85.19,49.27 RO5.2 91.01,47.04 ESC5.1
PWM5V6
  Top 0.152: OI6.4 90.54,56.77 RO6.2 94,53.82 ESC6.1
PWM5V7
  Top 0.152: OI7.4 85.47,64.27 87.27,62.47 | 87.27,62.47 RO7.2 | ESC7.1 89.98,62.47 87.27,62.47
PWM5V8
  Top 0.152: OI8.4 89.99,71.77 RO8.2 94,69 ESC8.1
PWM5V9
  Top 0.152: OI9.4 85.09,79.27 RO9.2 89.74,77.11 ESC9.1
PWM5V10
  Top 0.152: 93.95,81 ESC10.1 91.8,82.2 RO10.2 90.96,86.77 OI10.4
PWM6
  Top 0.152: OR6.1 OI6.1
PWM7
  Top 0.152: OR7.1 OI7.1
PWM8
  Top 0.152: OR8.1 OI8.1
PWM9
  Top 0.152: OR9.1 OI9.1
PWM10
  Top 0.152: OR10.1 OI10.1
RCC_OSC_IN
  Top 0.152: IC1.5 43.85,54 43.85,53.91 43.85,50 40.5,46.65 39.3,46.65 37.55,44.9 C8.2 34.56,44.84 OSCILLATOR.2
RCC_OSC_OUT
  Top 0.152: OSCILLATOR.1 39.38,44.99 C9.2 44.35,50 IC1.6
SCL_BKPLN  (via drill 0.35)
  Top 0.152: U$1.SCL_SENSOR 80.2,6.9 79.15,7.95 74.49,7.95 v73.03,9.42 | 63.45,65.25 | 63.45,65.25 62.79,65.91 62.78,65.91 v60.74,65.91 | 63.45,65.25 71.88,56.82 71.88,15.92 72.97,14.73 v72.97,14.13 | IC1.41 45.36,71.02 45.35,71.01 45.35,67.35 44.86,66.86 v44.86,66.52
  Bottom 0.152: v73.03,9.42 72.97,9.47 v72.97,14.13 | v60.74,65.91 53.79,65.91 53.49,65.61 46.6,65.61 45.7,66.52 v44.86,66.52
SDA_BKPLN  (via drill 0.35)
  Top 0.152: U$1.SDA_SENSOR 77.54,3.29 | 77.54,3.29 77.46,3.37 | 77.82,3.57 77.69,3.44 | 77.69,3.44 77.54,3.29 | v54.35,65.25 54.7,64.89 63.3,64.89 71.53,56.67 v71.53,14.13 | v71.48,9.42 73.75,7.14 77.29,7.14 77.69,6.74 77.69,3.44 | v45.99,65.28 45.99,65.71 46.02,65.74 46.02,66.47 45.85,66.65 IC1.40
  Bottom 0.152: v71.53,14.13 71.53,9.47 v71.48,9.42 | v54.35,65.25 46.03,65.25 v45.99,65.28
SDIO_CK  (via drill 0.35)
  Top 0.152: v22.86,74.08 22.5,73.72 8.15,73.72 7.45,73.02 J5.5
  Top 0.2: v32.75,67.5 33.25,67 39.81,67 IC1.53
  Top 0.203: v29.39,67.61 24.97,72.03 v24.97,72.04
  Bottom 0.2: v29.39,67.61 32.64,67.61 v32.75,67.5
  Bottom 0.203: v24.97,72.04 22.94,74.08 v22.86,74.08
SDIO_CMD  (via drill 0.35)
  Top 0.152: J5.3 6.83,70.4 7.67,70.4 11.57,66.5 28.25,66.5
  Top 0.2: 28.25,66.5 v28.27,66.48
  Top 0.203: IC1.54 31.68,66.54 v31.67,66.55
  Bottom 0.203: v28.27,66.48 31.6,66.48 v31.67,66.55
SDIO_DO
  Top 0.152: IC1.39 46.31,71.08 46.31,77.06 | 46.31,77.06 46.31,77.29 | J5.7 12.56,75.22 18.57,81.23 24.93,81.23 26.58,79.58 45.54,79.58 46.28,78.84 46.28,77.09 46.31,77.06
SURGEPORTHI
  Top 0.152: IC1.16 49.35,53.09 66.14,36.3 OR3.2
SURGEPORTLOW
  Top 0.152: IC1.17 57.11,61.54 59.56,59.09 59.56,52.3 OR4.2
SURGESTBDHI
  Top 0.152: IC1.14 48.42,59.47 48.42,53.01 61.14,40.29 61.14,24.36 64.2,21.3 OR1.2
SURGESTBDLOW
  Top 0.152: IC1.15 48.92,59.47 48.92,53.02 61.49,40.44 61.49,35.37 OR2.2
SW_AFT
  Top 0.152: IC1.29 51.42,67.61 53.76,67.61 59.71,67.61 68.06,75.96 OR9.2
SW_FWD
  Top 0.152: IC1.30 59.49,68.04 66.8,75.35 66.8,87.5 68.06,88.77 OR10.2
SWITCH6  (via drill 0.35)
  Top 0.152: U$2.CK2 17.23,28.66 v17.37,28.8 | v48.49,52.01 48.19,51.7 48.19,33.8 43.19,28.8 v18.78,28.8 | v42.69,52.12 42.85,52.28 IC1.3
  Bottom 0.152: v17.37,28.8 v18.78,28.8 | v48.49,52.01 42.81,52.01 v42.69,52.12
SWITCH_3  (via drill 0.35)
  Top 0.152: IC1.9 45.85,56.67 46.92,55.6 46.92,37.14 44.78,35 18.83,35 v18.78,34.95 | U$2.CK5 14.43,34.95 v17.37,34.95
  Bottom 0.152: v17.37,34.95 v18.78,34.95
SWITCH_4  (via drill 0.35)
  Top 0.152: v18.78,32.87 45.14,32.87 47.47,35.2 47.47,56.06 46.42,57.12 46.42,59.47 IC1.10 | U$2.CK4 14.06,32.82 v17.45,32.82
  Bottom 0.152: v17.45,32.82 18.73,32.82 v18.78,32.87
SWITCH_5  (via drill 0.35)
  Top 0.152: IC1.11 46.85,57.2 47.83,56.21 47.83,33.95 44.39,30.5 v18.78,30.5 | v17.46,30.53 13.85,30.53 U$2.CK3
  Bottom 0.152: v18.78,30.5 17.48,30.5 v17.46,30.53
SYS_JTCK-SWCLK
  Top 0.152: J4.9 21.9,62.73 28.28,62.73 30.53,64.99 30.53,67.53 32.04,69.04 IC1.49
SYS_JTDI  (via drill 0.35)
  Top 0.152: J4.7 24.08,62.37 28.42,62.37 30.89,64.84 30.89,67.38 31.89,68.38 v33.78,68.38 | v41.74,68.4 42.85,69.52 IC1.46
  Bottom 0.152: v33.78,68.38 33.8,68.4 v41.74,68.4
SYS_JTDO-SWO
  Top 0.152: J4.13 15.01,58.33 24.47,58.33 25.14,59.01 25.14,60.28 26.24,61.38 32.56,61.38 37.22,66.04 IC1.55
SYS_JTMS-SWIDIO  (via drill 0.35)
  Top 0.152: J4.5 26.26,62.02 28.57,62.02 32.41,65.85 v33.69,65.85 | v35.39,67.68 36.19,68.49 39.8,68.49 IC1.50
  Bottom 0.152: v33.69,65.85 35.39,67.55 v35.39,67.68
SYS_JTRST
  Top 0.152: IC1.56 37.52,65.54 32.93,60.95 27.74,60.95 J4.3
USB_OTG_HS_DM
  Top 0.152: D-SERIES.1 47.16,87.88 48.34,86.69 IC1.35
USB_OTG_HS_DP
  Top 0.152: D+SERIES.1 47.16,86.69 47.85,86 IC1.36
VCAP
  Top 0.203: IC1.47 42.35,74.44 C11.2
VCAP2
  Top 0.25: IC1.31 51.33,68.56 50.49,68.56 50.3,68.75 50.3,69.32 51,70.03 C12.1
(copper drawn outside any net)
  shapes: Top area x7

## Text on the board
tPlace: The Underwater Robotics Team / Center For Automotive Research | START | SW4 | SW3 | SW5 | SW6
tNames: 5V | PC5 | PC4 | PA5 | PA4 | 3.3V | SWF | SWA | HPA | HPF | HSA | HSF | PB9 | PB8 | PC13 | PC14 | SPL | SPH | SSL | CANH | CANL | SSH